# Altium PCB PCB.PcbDoc (part 1 of 2)
Units mm, origin at the board's own origin, x right, y up, seen from the top; angles counter-clockwise.
Board outline 82.77 x 70.07 mm, 4 copper layers (Top Layer, InternalPlane1, InternalPlane2, Bottom Layer), stack 1.963 mm thick; 175 components, 121 nets, 576 pads, 458 vias.
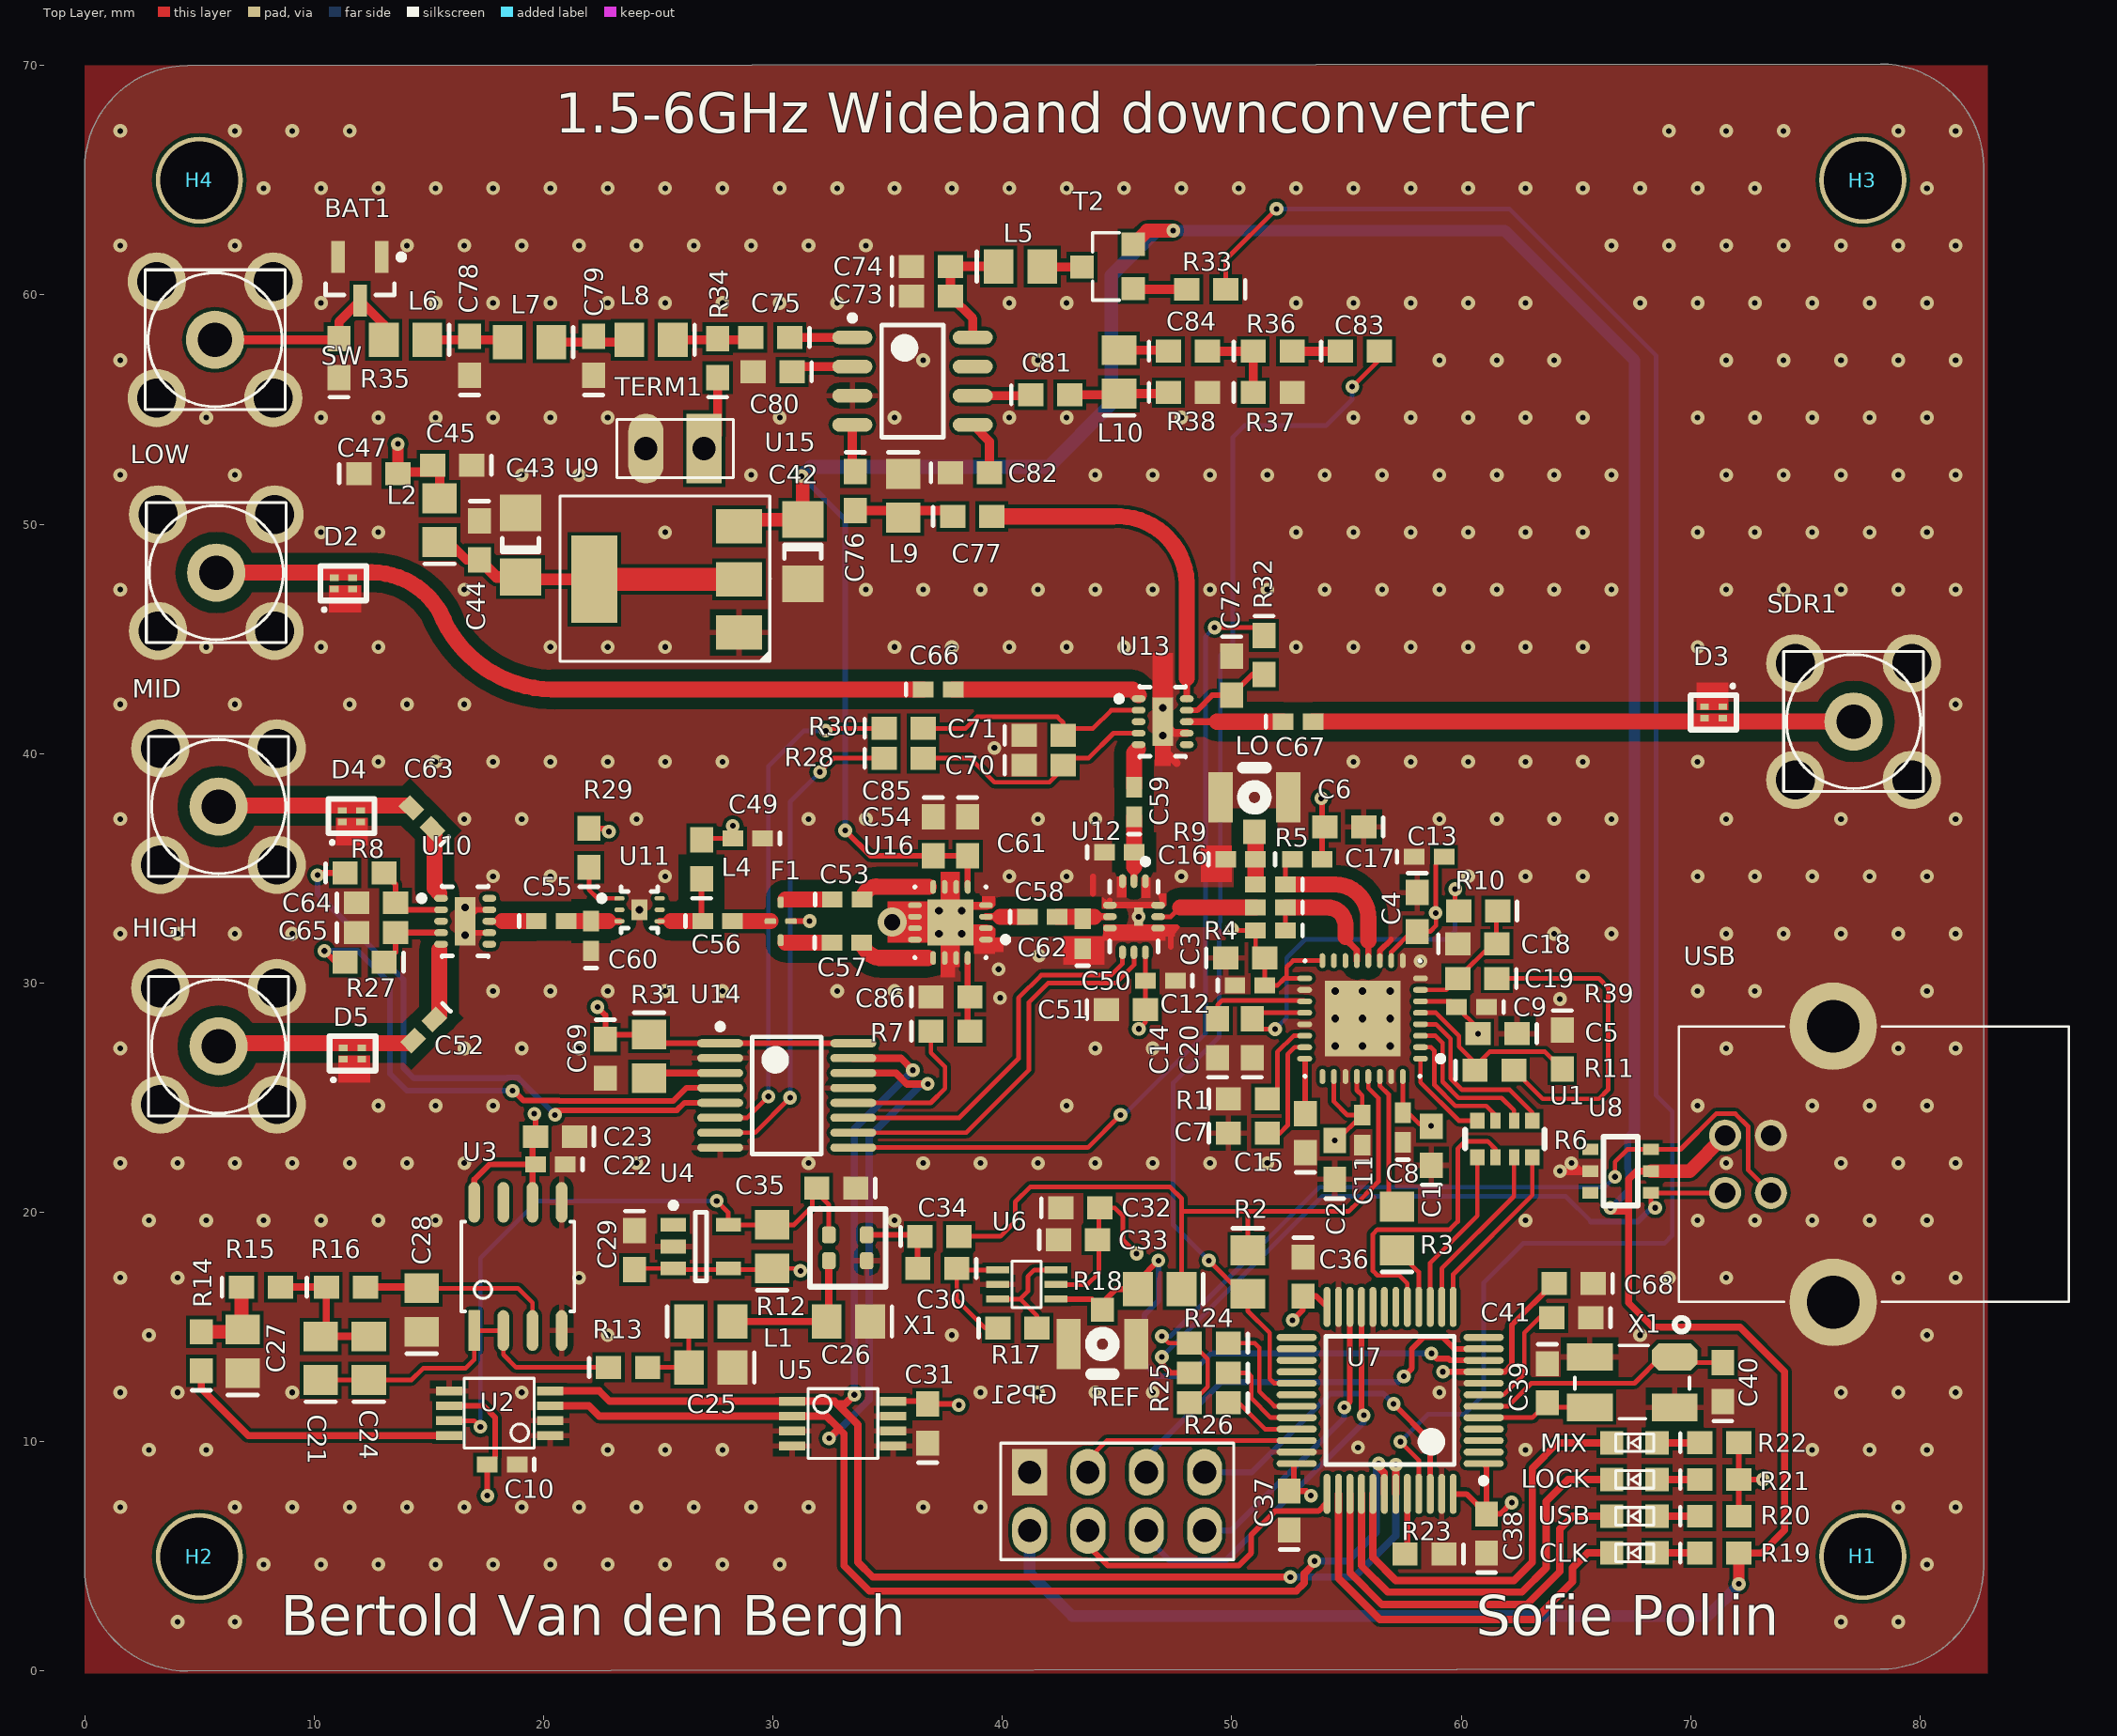
[diagram p0: Top Layer view]
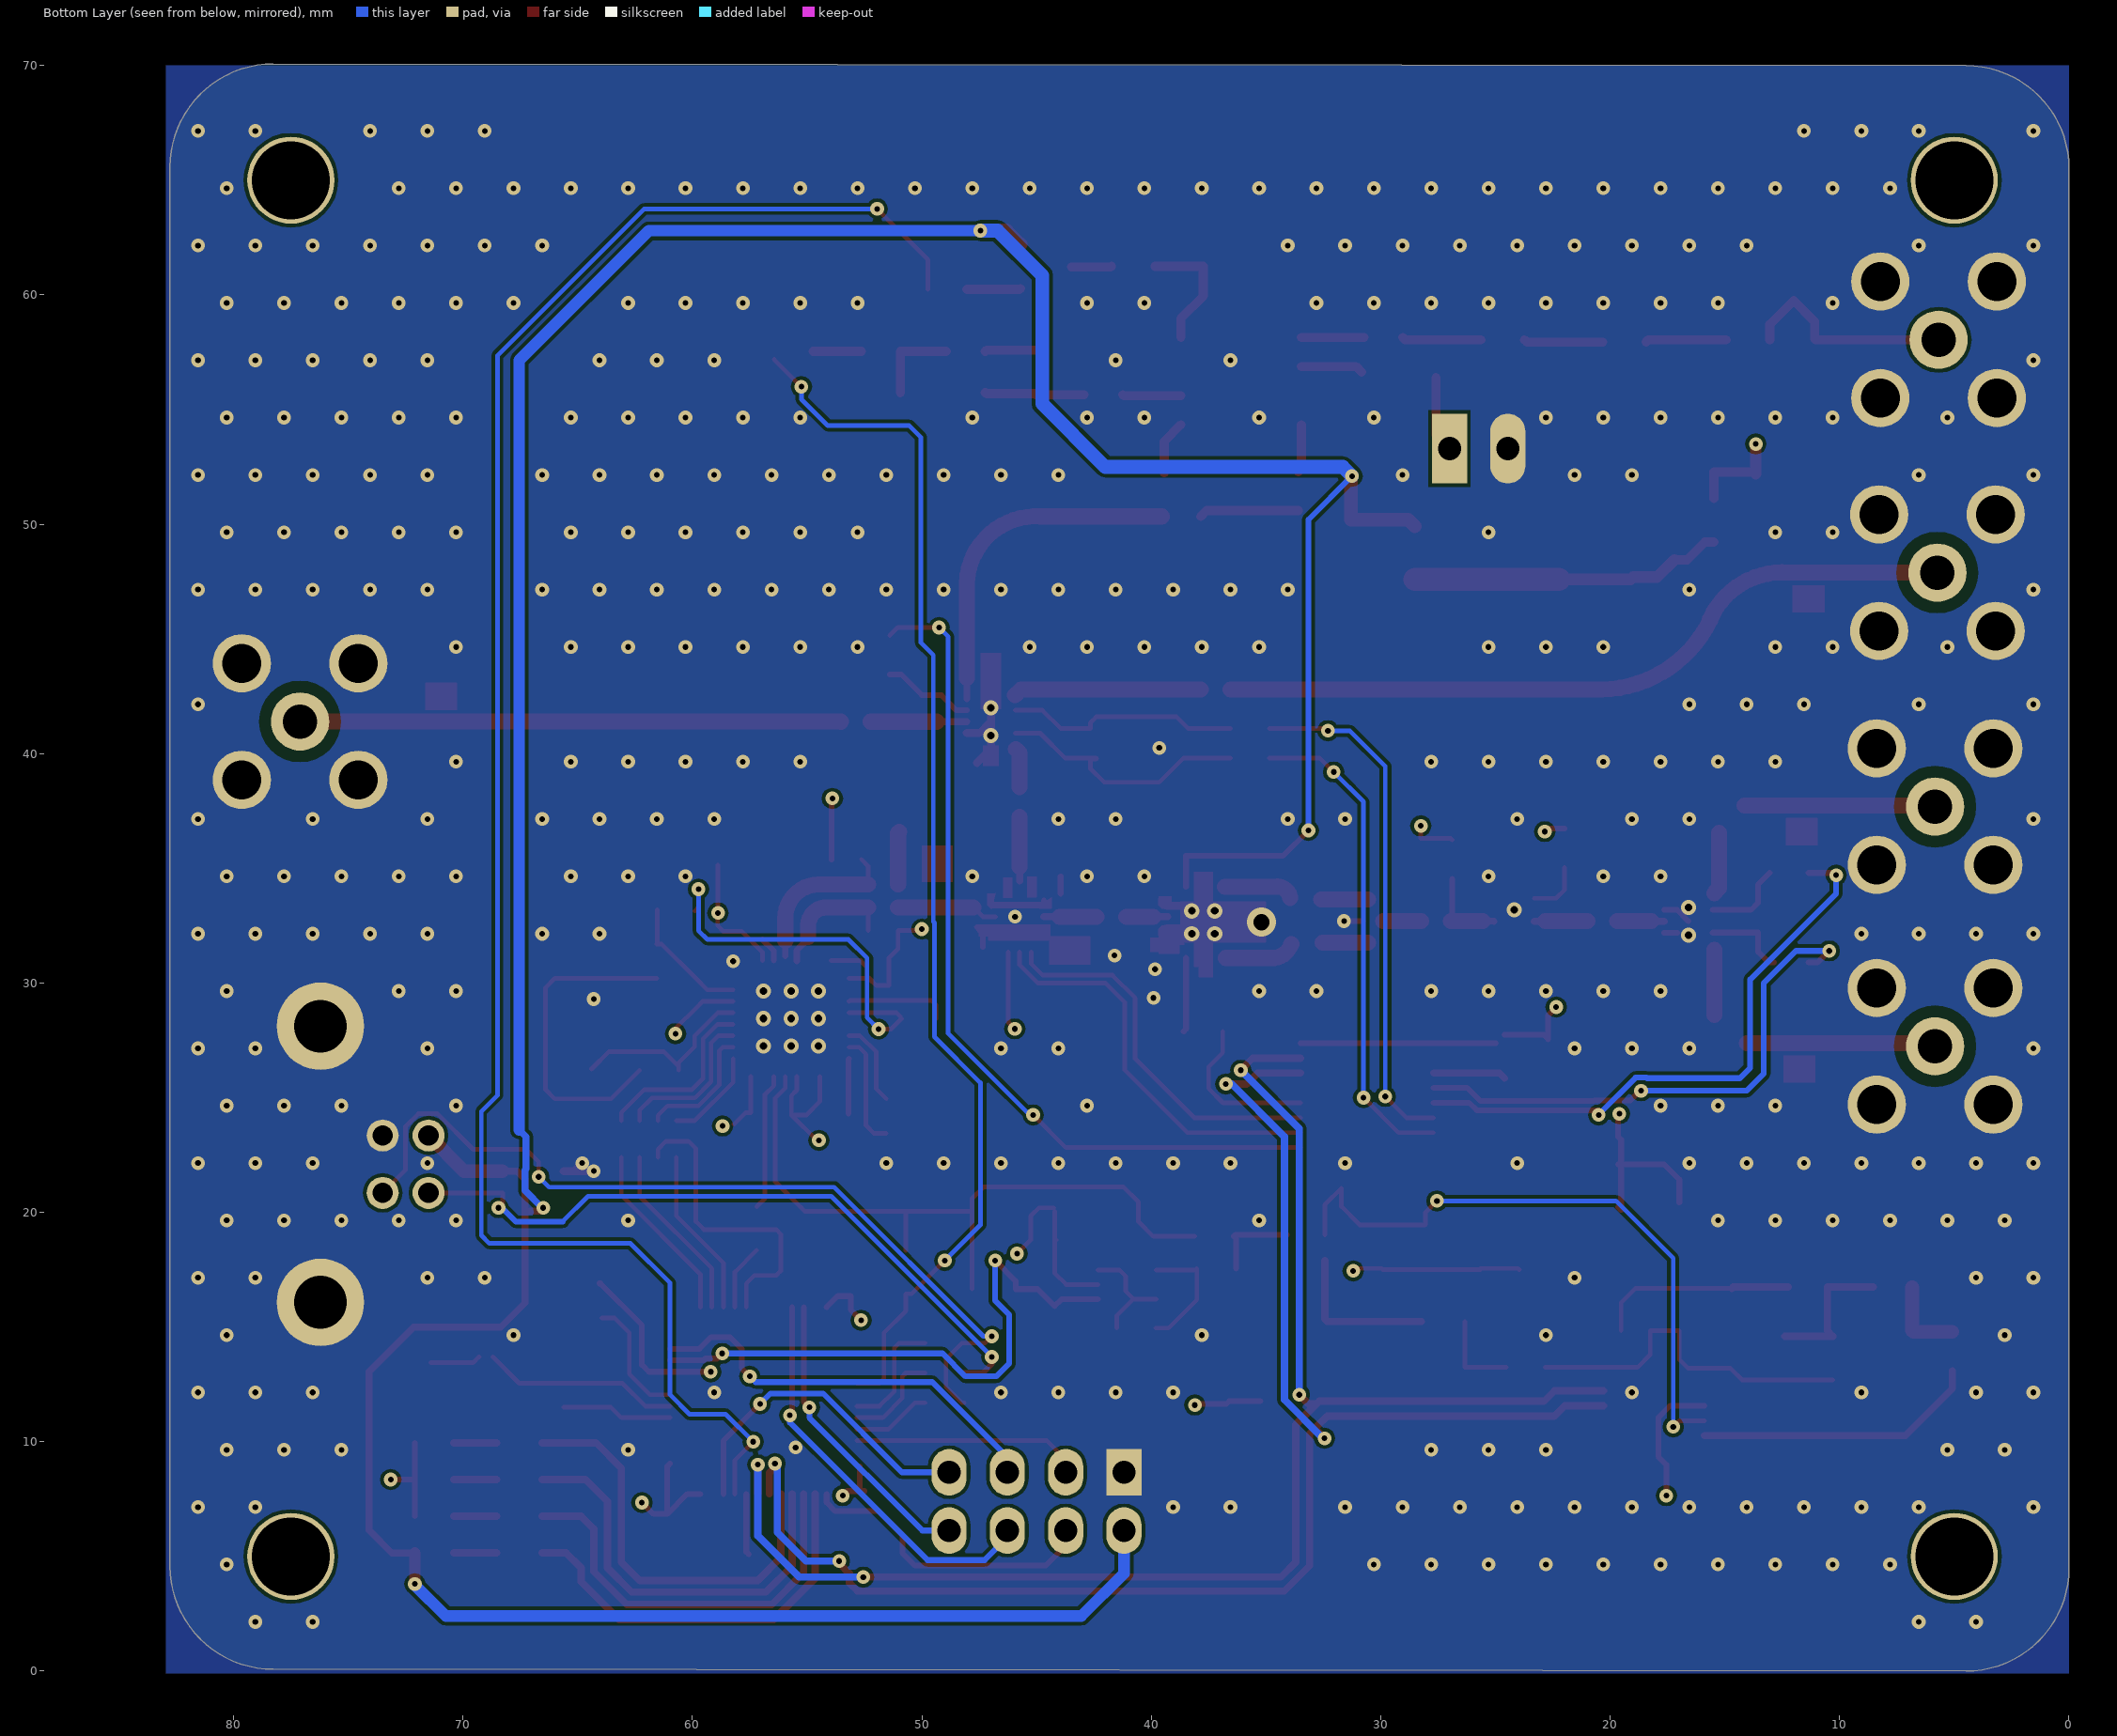
[diagram p1: Bottom Layer view, seen from below]
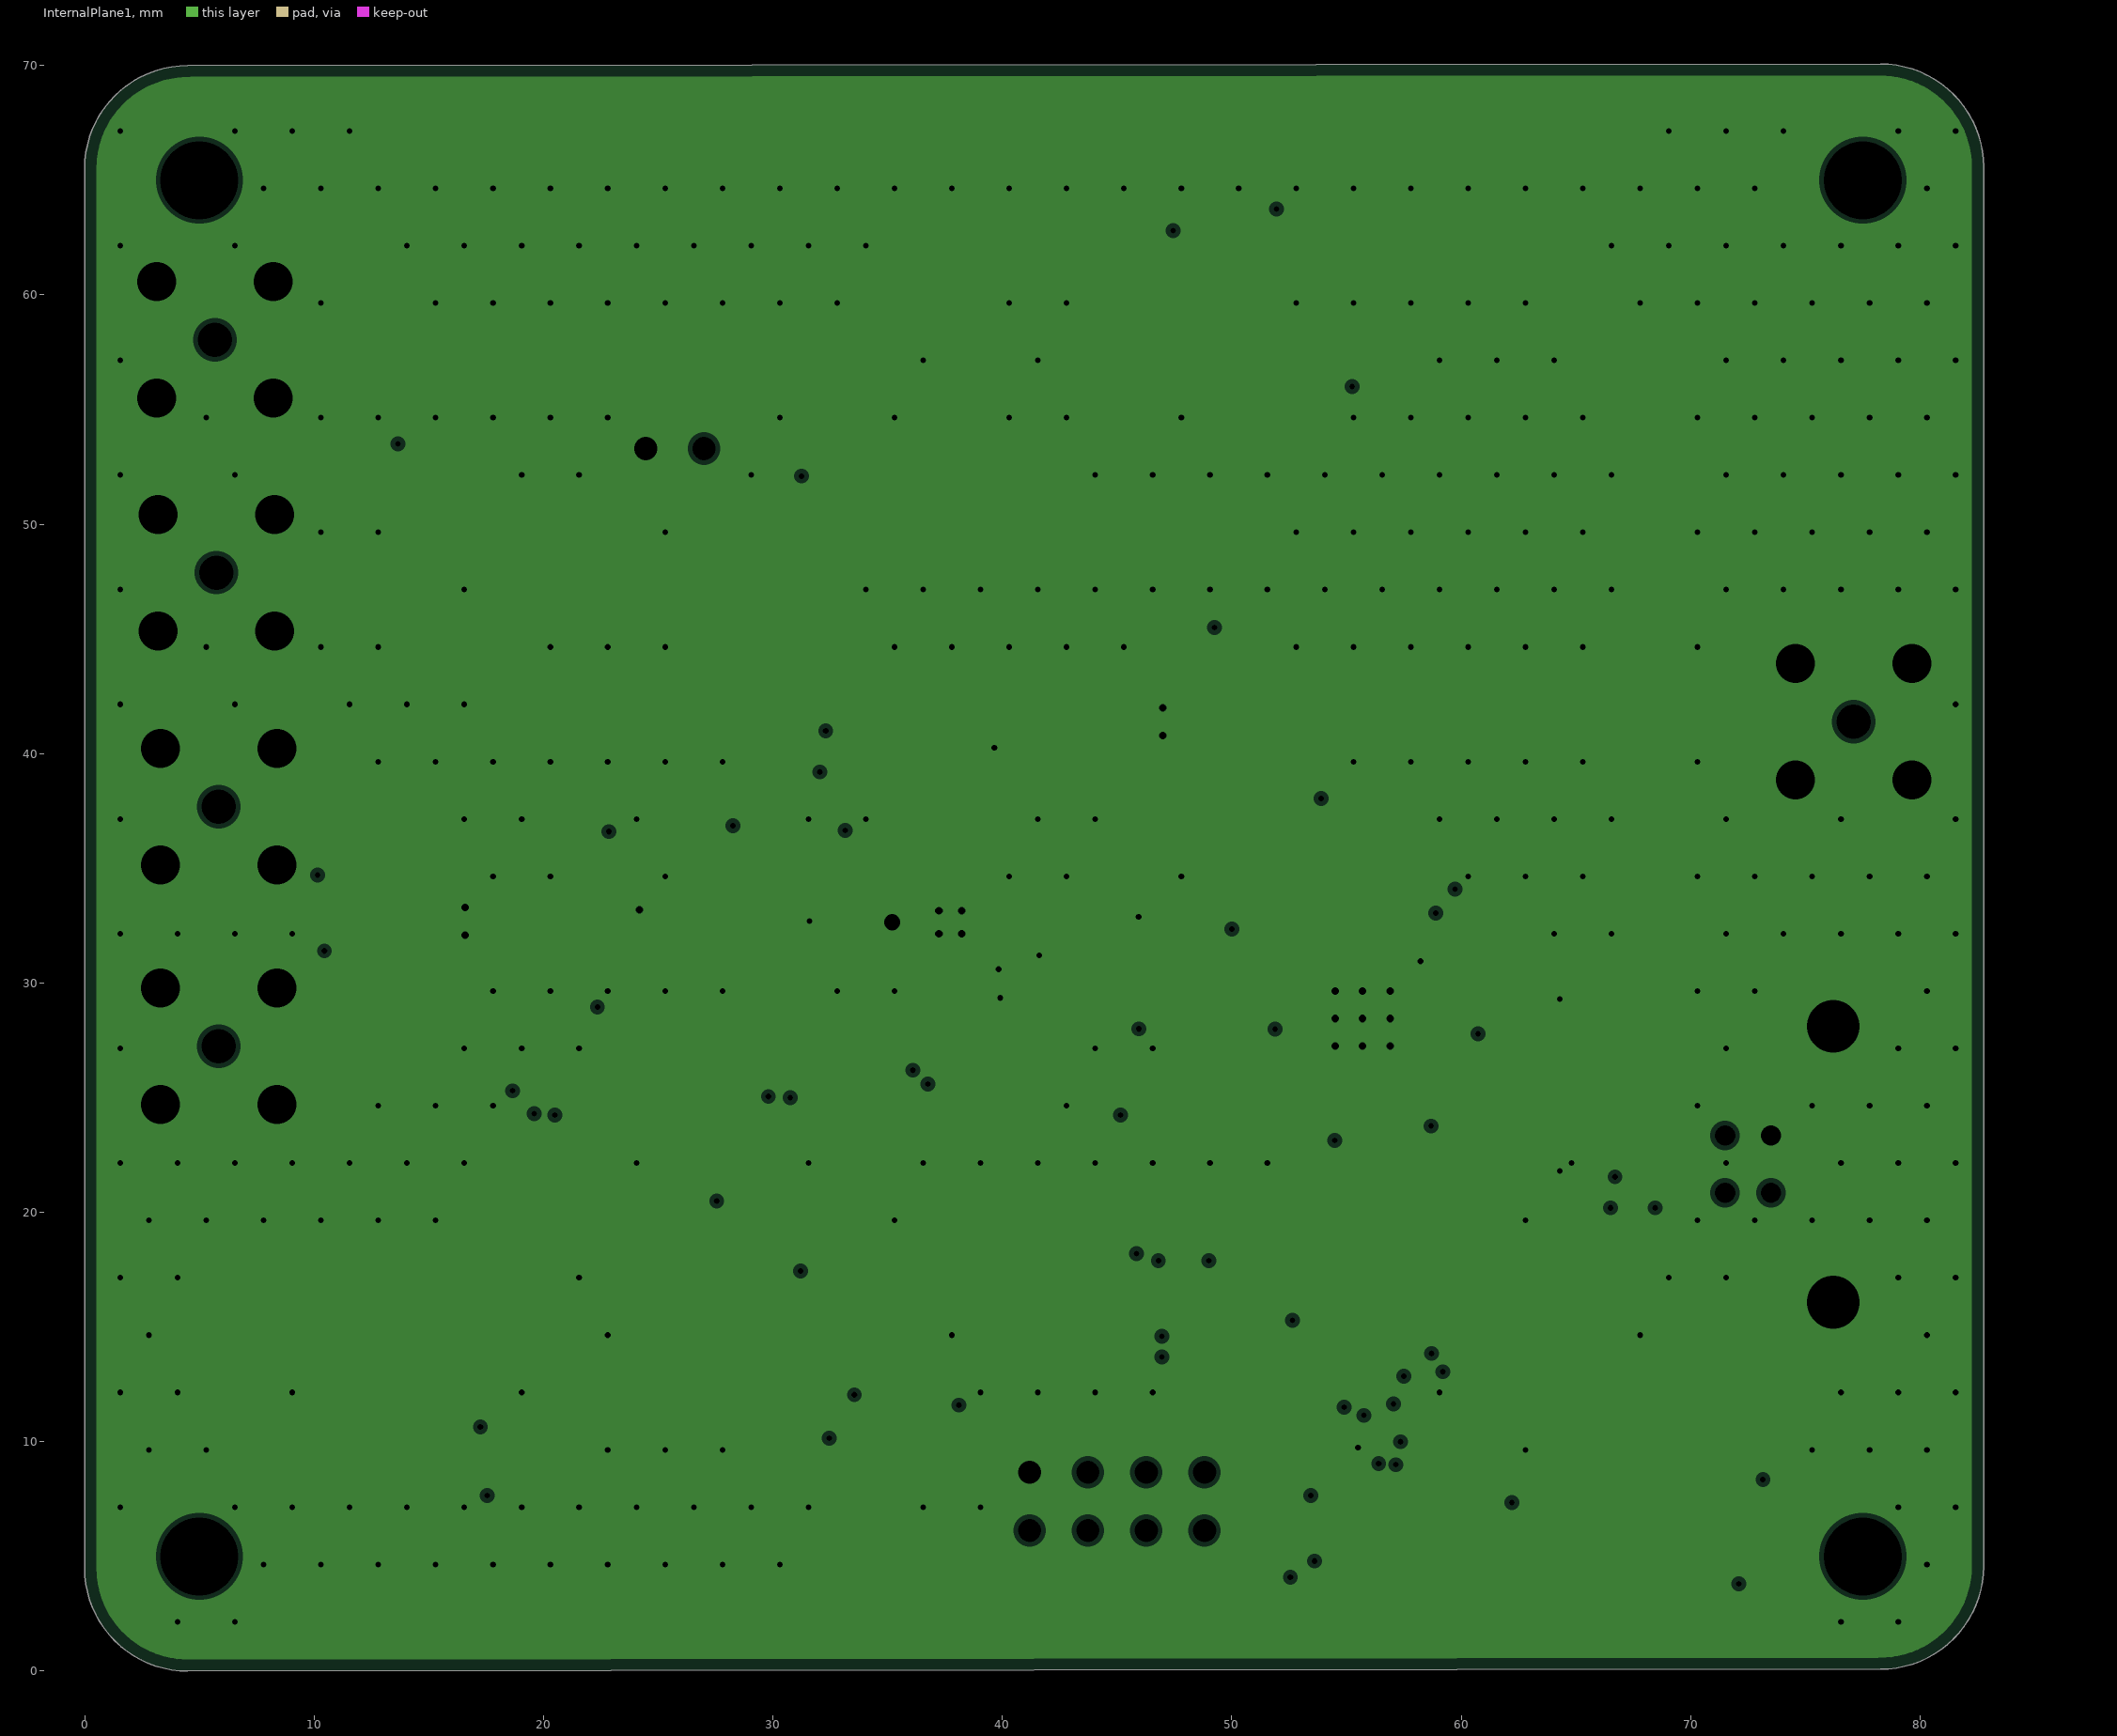
[diagram p2: InternalPlane1, clearances drawn from the general rule]
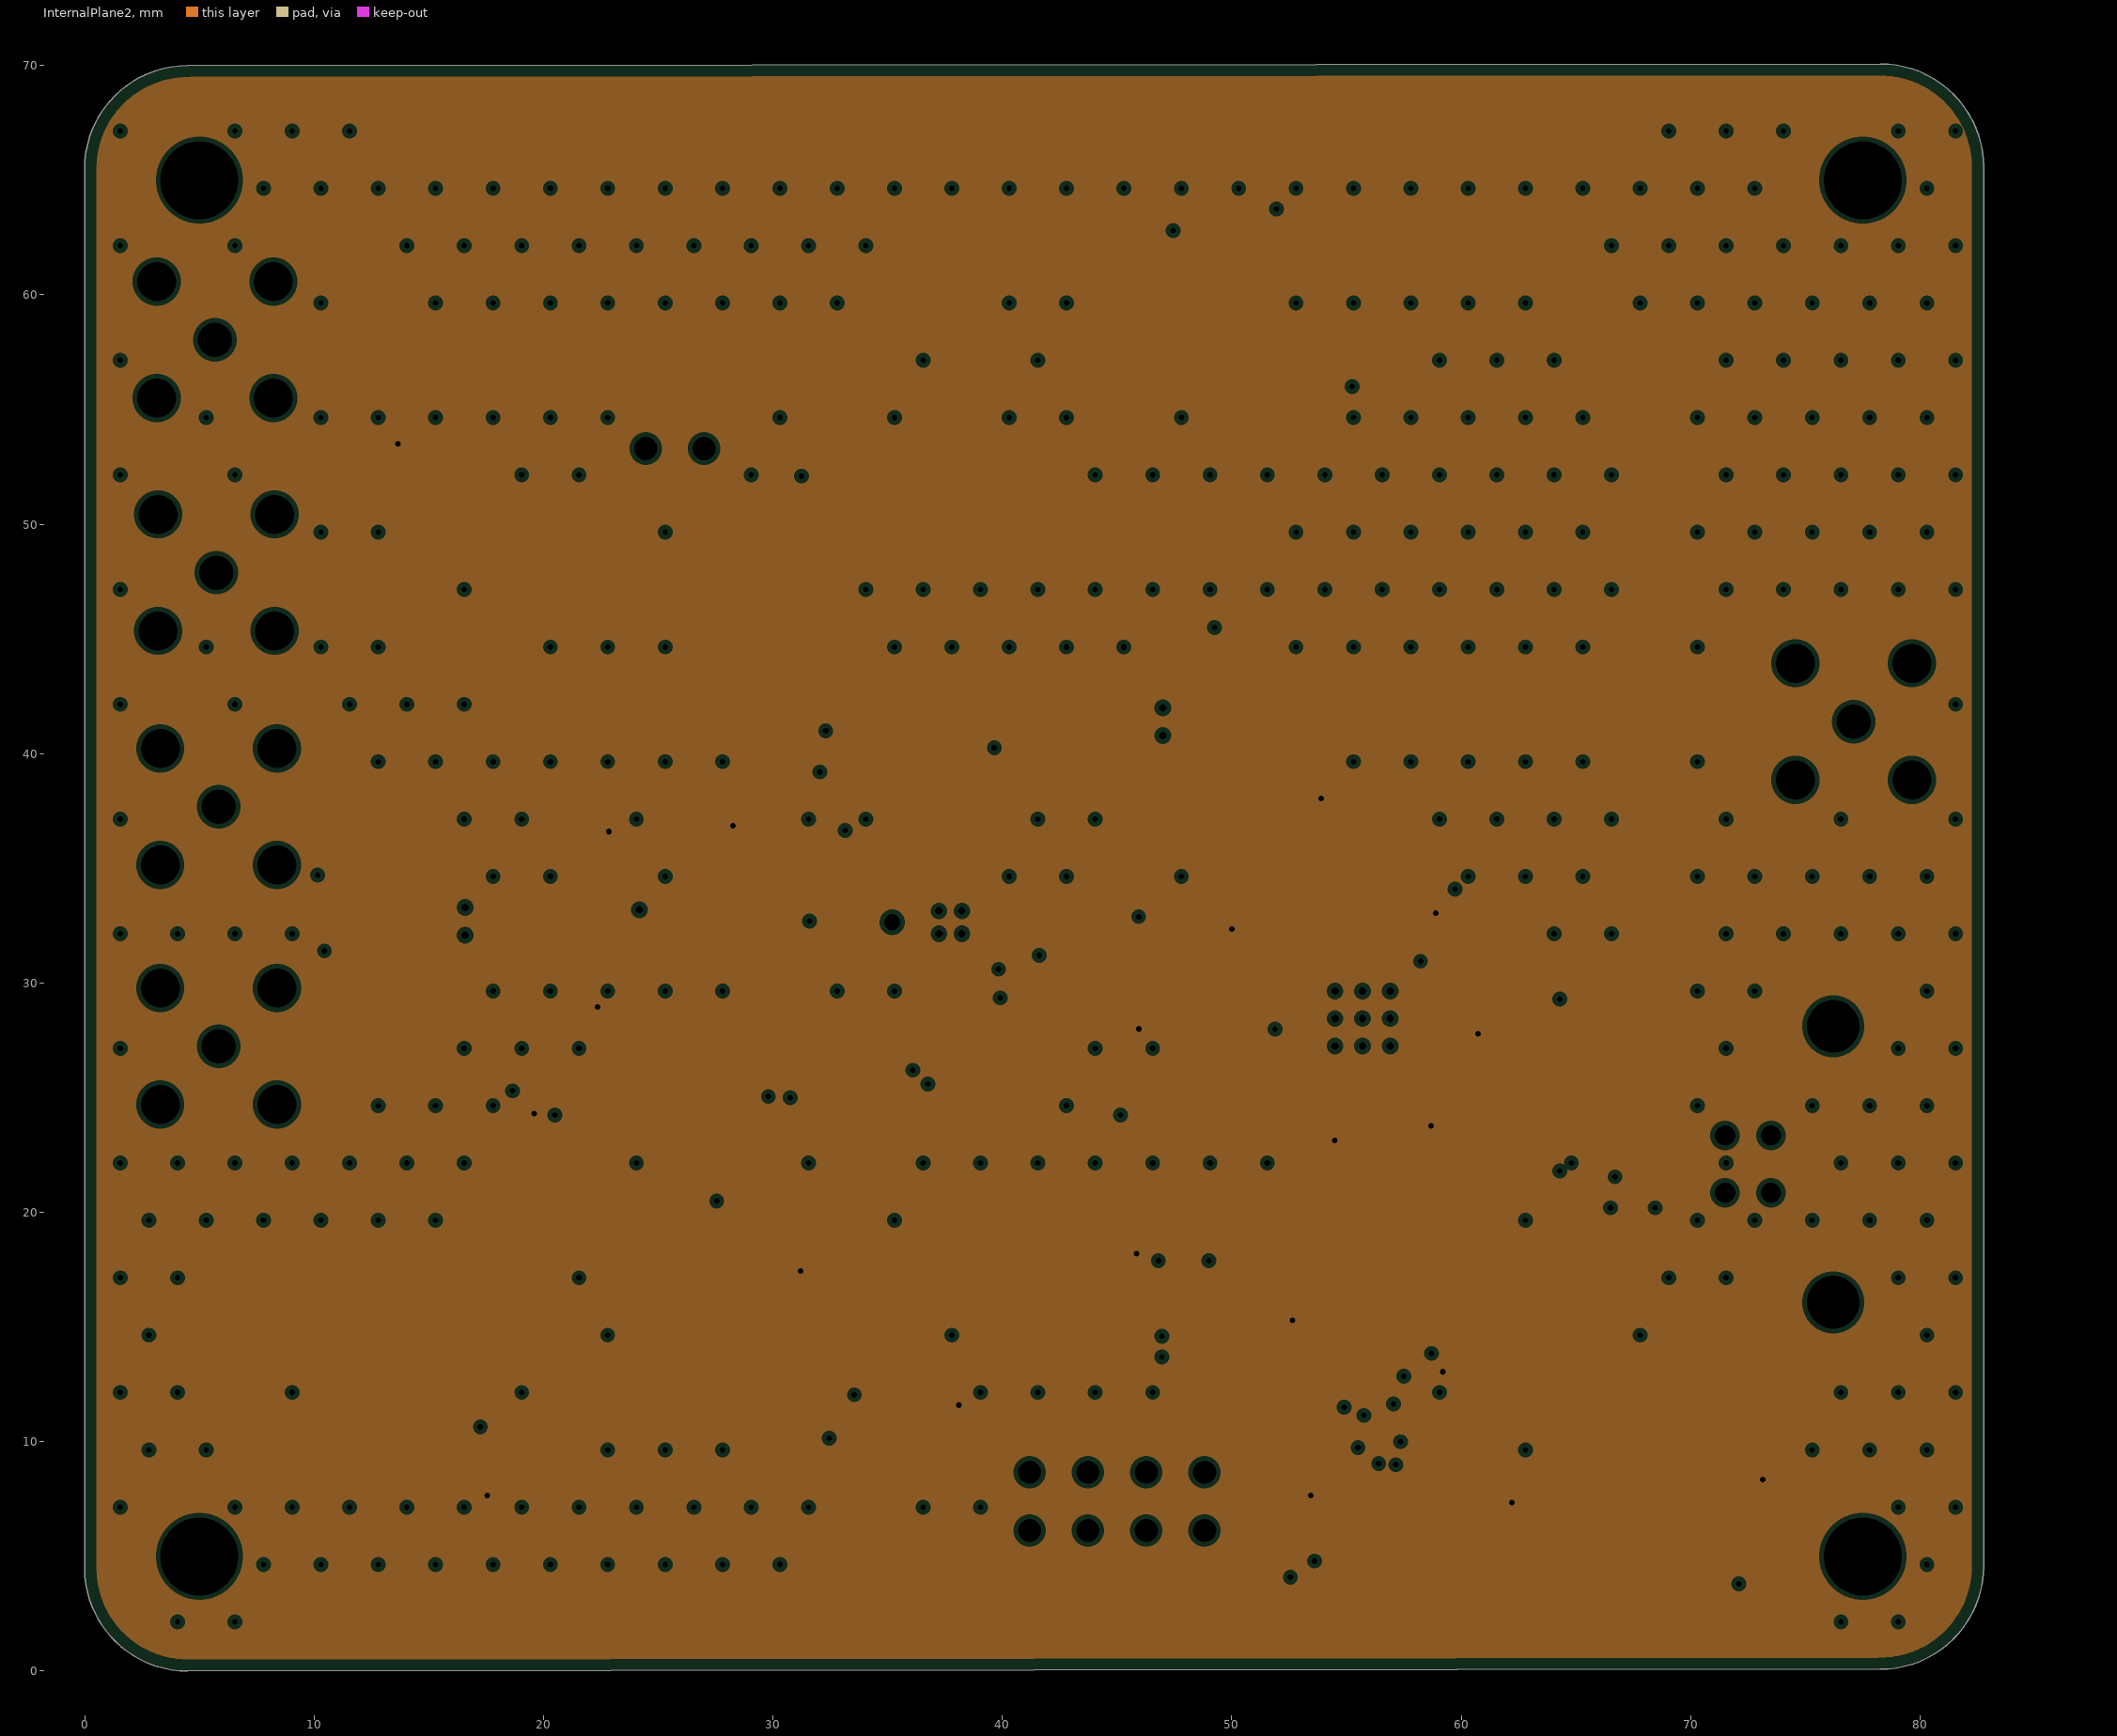
[diagram p3: InternalPlane2, clearances drawn from the general rule]

## Layer stack, top to bottom
Top Layer: signal copper 0.0356
Dielectric: core 0.36, FR-4, Dk 4.8
InternalPlane1: plane copper 0.036, net GND
Dielectric: prepreg 1.1, FR-4, Dk 4.8
InternalPlane2: plane copper 0.036, net 3V3
Dielectric: core 0.36, FR-4, Dk 4.8
Bottom Layer: signal copper 0.0356

## Board outline
0,4.5 0,65.5 cw(c4.5,65.5) 4.5,70 78.268,70.068 cw(c78.268,65.568) 82.768,65.568 82.768,4.582 cw(c78.268,4.582) 78.268,0.082 4.5,0 cw(c4.5,4.5)

## Design rules (kind name [scope] priority, off if disabled: settings)
Clearance Clearance_1 [(InPolygon) vs InNetClass('RF')] p1: gap=0.5
Clearance [All] p2: gap=0.15
DiffPairsRouting [(InDifferentialPairClass('All Differential Pairs'))] p1: maxlimit=0.254 minlimit=0.254 mostfreqgap=0.254 maxuncoupledlength=12.7
HoleSize [All] p1: absolutevalues=TRUE maxlimit=3.5 minlimit=0.025 maxpercent=80.000 minpercent=20.000
MinimumAnnularRing [All] p1: minimumring=0.125
MinimumSolderMaskSliver [All] p1: minsoldermaskwidth=0
PlaneClearance [All] p1: clearance=0.2
PlaneConnect [All] p1: planeconnectstyle=Direct reliefexpansion=0.508 reliefentries=4 reliefconductorwidth=0.254 reliefairgap=0.254
PolygonConnect PolygonConnect_1 [(InPadClass('Direct') or isVia) vs InNet('GND')] p1: connectstyle=Direct reliefconductorwidth=0.254 reliefentries=4 polygonreliefangle="90 Angle" airgapwidth=0.254
PolygonConnect [All] p2: connectstyle=Relief reliefconductorwidth=0.254 reliefentries=4 polygonreliefangle="90 Angle" airgapwidth=0.254
RoutingVias [All] p1: holewidth=0.4 width=0.8 viastyle="Through Hole" minholewidth=0.25 minwidth=0.6 maxholewidth=2 maxwidth=2.5
SilkToSilkClearance [All] p1 off: silktosilkclearance=0.254
SilkscreenOverComponentPads [IsPad] p1 off: minsilkscreentomaskgap=0.254
SolderMaskExpansion [All] p1: expansion=0
Width [All] p1: maxlimit=2.54 minlimit=0.15 preferedwidth=0.22
21 further rules are at their usual default settings.

## Classes and differential pairs
pad class Direct: BAT1-1 BAT1-2 BAT1-3 C7-2 C8-1 C8-2 C9-1 C9-2 C10-1 C10-2 C11-1 C11-2 C12-1 C12-2 C13-1 C13-2 C14-1 C14-2 C15-1 C15-2 C16-1 C16-2 C17-1 C17-2 C18-1 C18-2 C19-1 C19-2 C20-1 C20-2 C21-1 C21-2 C22-1 C22-2 C23-1 C23-2 C24-1 C24-2 C25-1 C25-2 C26-1 C26-2 C27-1 C27-2 C28-1 C28-2 C29-1 C29-2 C30-1 C30-2 C31-1 C31-2 C32-1 C32-2 C33-1 C33-2 C34-1 C34-2 C35-1 C35-2 C36-1 C36-2 C37-1 C37-2 C38-1 C38-2 C39-1 C39-2 C40-1 C40-2 C41-1 C41-2 C42-0 C42-1 C42-2 C43-0 C43-1 C43-2 C44-1 C44-2 C45-1 C45-2 C47-1 C47-2 C49-1 C49-2 C50-1 C50-2 C51-1 C51-2 C52-1 C52-2 C53-1 C53-2 C54-1 C54-2 C55-1 C55-2 C56-1 C56-2 C57-1 C57-2 C58-1 C58-2 C59-1 C59-2 C60-1 C60-2 C61-1 C61-2 C62-1 C62-2 C63-1 C63-2 C64-1 C64-2 C65-1 C65-2 C66-1 C66-2 C67-1 C67-2 C68-1 C68-2 C69-1 C69-2 C70-1 C70-2 C71-1 C71-2 C72-1 C72-2 C73-1 C73-2 C74-1 C74-2 C75-1 C75-2 C76-1 C76-2 C77-1 C77-2 C78-1 C78-2 C79-1 C79-2 C80-1 C80-2 C81-1 C81-2 C82-1 C82-2 C83-1 C83-2 C84-1 C84-2 C85-1 C85-2 C86-1 C86-2 CLK-1 CLK-2 D2-1 D2-2 D2-3 D2-4 D3-1 D3-2 D3-3 D3-4 D4-1 D4-2 D4-3 D4-4 D5-1 D5-2 D5-3 D5-4 DATA1-1 DATA1-2 DATA1-3 DATA1-4 DATA1-5 DATA1-6 F1-1 F1-2 F1-3 F1-4 GPS1-1 GPS1-2 GPS1-3 GPS1-4 GPS1-5 GPS1-6 GPS1-7 GPS1-8 H1-0 H2-0 H3-0 H4-0 HIGH-1 HIGH-2 HIGH-3 HIGH-4 HIGH-5 L1-1 L1-2 L2-1 L2-2 L4-1 L4-2 L5-1 L5-2 L6-1 L6-2 L7-1 L7-2 L8-1 L8-2 L9-1 L9-2 L10-1 L10-2 LO-0 LO-1 LOCK-1 LOCK-2 LOW-1 LOW-2 LOW-3 LOW-4 LOW-5 MID-1 MID-2 MID-3 MID-4 MID-5 MIX-1 MIX-2 R1-1 R1-2 R2-1 R2-2 R3-1 R3-2 R4-1 R4-2 R5-1 R5-2 R6-1 R6-2 R6-3 R6-4 R6-5 R6-6 R6-7 R6-8 R7-1 R7-2 R8-1 R8-2 R9-1 R9-2 R10-1 R10-2 R11-1 R11-2 R12-1 R12-2 R13-1 R13-2 R14-1 R14-2 R15-1 R15-2 R16-1 R16-2 R17-1 R17-2 R18-1 R18-2 R19-1 R19-2 R20-1 R20-2 R21-1 R21-2 R22-1 R22-2 R23-1 R23-2 R24-1 R24-2 R25-1 R25-2 R26-1 R26-2 R27-1 R27-2 R28-1 R28-2 R29-1 R29-2 R30-1 R30-2 R31-1 R31-2 R32-1 R32-2 R33-1 R33-2 R34-1 R34-2 R35-1 R35-2 R36-1 R36-2 R37-1 R37-2 R38-1 R38-2 R39-1 R39-2 REF-0 REF-1 SDR1-1 SDR1-2 SDR1-3 SDR1-4 SDR1-5 SW-1 SW-2 SW-3 SW-4 SW-5 T2-1 T2-2 T2-3 TERM1-1 TERM1-2 U1-1 U1-2 U1-3 U1-4 U1-5 U1-6 U1-7 U1-8 U1-9 U1-10 U1-11 U1-12 U1-13 U1-14 U1-15 U1-16 U1-17 U1-18 U1-19 U1-20 U1-21 U1-22 U1-23 U1-24 U1-25 U1-26 U1-27 U1-28 U1-29 U1-30 U1-31 U1-32 U1-33 U8-1 U8-2 U8-3 U8-4 U8-5 U8-6 U8-7 U9-4 U10-1 U10-2 U10-3 U10-4 U10-5 U10-6 U10-7 U10-8 U10-9 U10-10 U10-11 U11-1 U11-2 U11-3 U11-4 U11-5 U11-6 U11-7 U12-1 U12-2 U12-3 U12-4 U12-5 U12-6 U12-7 U12-8 U12-9 U12-10 U12-11 U12-12 U12-13 U13-1 U13-2 U13-3 U13-4 U13-5 U13-6 U13-7 U13-8 U13-9 U13-10 U13-11 USB-1 USB-2
component class U_Mixer: C49 C50 C51 C52 C53 C54 C55 C56 C57 C58 C59 C60 C61 C62 C63 C64 C65 C66 C67 C68 C69 C70 C71 C72 C85 C86 D2 D3 D4 D5 F1 HIGH L4 LOW MID R7 R8 R27 R28 R29 R30 R31 R32 SDR1 U10 U11 U12 U13 U14 U16
component class U_MixerHF: BAT1 C73 C74 C75 C76 C77 C78 C79 C80 C81 C82 C83 C84 L5 L6 L7 L8 L9 L10 R33 R34 R35 R36 R37 R38 SW T2 TERM1 U15
component class U_LO: C1 C2 C3 C4 C5 C6 C7 C8 C9 C10 C11 C12 C13 C14 C15 C16 C17 C18 C19 C20 C21 C22 C23 C24 C25 C26 C27 C28 C29 C30 C31 C32 C33 C34 C35 L1 LO R1 R2 R3 R4 R5 R6 R9 R10 R11 R12 R13 R14 R15 R16 R17 R18 R39 REF U1 U2 U3 U4 U5 U6 X1
component class U_CPU: C36 C37 C38 C39 C40 C41 C42 C43 C44 C45 C47 CLK GPS1 L2 LOCK MIX R19 R20 R21 R22 R23 R24 R25 R26 U7 U8 U9 USB X1
net class RF: LO+ LO- NetC16_1 NetC17_1 NetC52_1 NetC52_2 NetC53_1 NetC53_2 NetC55_1 NetC55_2 NetC56_1 NetC57_1 NetC57_2 NetC58_1 NetC58_2 NetC59_1 NetC59_2 NetC63_1 NetC63_2 NetC66_1 NetC66_2 NetC67_1 NetC67_2
component class Toplevel: H1 H2 H3 H4

## Components (designator, comment, footprint, x,y, rotation, side; value= is the part's Value field where it differs from the comment)
BAT1 "" SOT95P230X110-3N 12,60.7 r270 top
C1 "100nF" "smd C0603_0.80" 58.7,22.9 r90 top
C2 "100nF" "smd C0603_0.80" 54.486,22.292 r90 top
C3 "100nF" "smd C0603_0.80" 50.586,31.092 r0 top
C4 "100nF" "smd C0603_0.80" 58.086,33.092 r270 top
C5 "100nF" "smd C0603_0.80" 61.586,27.792 r180 top
C6 "100nF" "smd C0603_0.80" 54.9,36.8 r180 top
C7 "1uF" "smd C0603_0.80" 50.7,23.45 r0 top
C8 "10nF" "smd C0402" 57.45,23.7 r90 top
C9 "10nF" "smd C0402" 60.45,28.95 r180 top
C10 "10nF" "smd C0402" 18.2,9 r180 top
C11 "10nF" "smd C0402" 55.686,23.592 r90 top
C12 "10nF" "smd C0402" 50.786,29.892 r0 top
C13 "10nF" "smd C0402" 58.6,35.5 r0 top
C14 "1uF" "smd C0603_0.80" 49.386,27.592 r90 top
C15 "1uF" "smd C0603_0.80" 53.2,23.45 r90 top
C16 "22pF" "smd C0402" 51.686,33.292 r180 top
C17 "22pF" "smd C0402" 51.686,34.292 r180 top
C18 "12nF" "smd C0603_0.80" 60.7,31.7 r0 top
C19 "100nF" "smd C0603_0.80" 60.7,30.2 r180 top
C20 "820pF" "smd C0603_0.80" 50.886,27.592 r90 top
C21 "3.3uF" "smd C0805_1.30" 10.286,13.642 r90 top
C22 "10nF" "smd C0402" 20.3,22.1 r180 top
C23 "100nF" "smd C0603_0.80" 20.5,23.3 r180 top
C24 "2.2uF" "smd C0805_1.30" 12.386,13.642 r90 top
C25 "330nF" "smd C0805_0.60" 27.286,13.242 r180 top
C26 "330nF" "smd C0805_0.60" 33.286,15.242 r180 top
C27 "2.2uF" "smd C0805_1.30" 6.886,13.942 r90 top
C28 "330nF" "smd C0805_0.60" 14.686,15.742 r90 top
C29 "100nF" "smd C0603_0.80" 23.961,18.357 r270 top
C30 "100nF" "smd C0603_0.80" 37.161,17.557 r180 top
C31 "100nF" "smd C0603_0.80" 36.736,10.792 r90 top
C32 "100nF" "smd C0603_0.80" 43.4,20.2 r0 top
C33 "10nF" "smd C0603_0.80" 43.3,18.8 r0 top
C34 "100nF" "smd C0603_0.80" 37.261,18.957 r0 top
C35 "100nF" "smd C0603_0.80" 32.761,21.057 r180 top
C36 "100nF" "smd C0603_0.80" 53.1,17.2 r270 top
C37 "100nF" "smd C0603_0.80" 52.5,7 r90 top
C38 "100nF" "smd C0603_0.80" 61.1,6 r90 top
C39 "10pF" "smd C0603_0.80" 63.75,12.55 r270 top
C40 "10pF" "smd C0603_0.80" 71.4,12.6 r90 top
C41 "100nF" "smd C0603_0.80" 64.8,15.4 r180 top
C42 "10uF" "smd C1206 polar" 31.3,48.8 r270 top
C43 "10uF" "smd C1206 polar" 19,49.1 r90 top
C44 "100nF" "smd C0603_0.80" 17.2,49.3 r270 top
C45 "100nF" "smd C0603_0.80" 16.025,52.575 r180 top
C47 "10nF" "smd C0603_0.80" 12.8,52.2 r0 top
C49 "10nF" "smd C0402" 28.9,36.3 r180 top
C50 "10nF" "smd C0402" 46.886,30.092 r180 top
C51 "100nF" "smd C0603_0.80" 45.386,28.842 r0 top
C52 "22pF" "smd C0402" 14.775,27.95 r225 top
C53 "22pF" "smd C0402" 33.236,33.642 r0 top
C54 "100nF" "smd C0603_0.80" 36.986,36.392 r270 top
C55 "22pF" "smd C0402" 20.336,32.692 r0 top
C56 "22pF" "smd C0402" 27.586,32.692 r0 top
C57 "100pF" "smd C0402" 33.225,31.75 r0 top
C58 "22pF" "smd C0402" 41.736,32.892 r0 top
C59 "100pF" "smd C0402" 45.736,37.892 r90 top
C60 "0.2pF" "smd C0402" 22.075,32.05 r90 top
C61 "0.15pF" "smd C0402" 45.1,35.7 r0 top
C62 "0.15pF" "smd C0402" 43.5,32.15 r90 top
C63 "100pF" "smd C0402" 14.7,37.175 r135 top
C64 "100pF" "smd C0603_0.80" 12.7,33.5 r0 top
C65 "100pF" "smd C0603_0.80" 12.7,32.2 r0 top
C66 "100pF" "smd C0402" 37.2,42.8 r0 top
C67 "100pF" "smd C0402" 52.886,41.392 r0 top
C68 "100nF" "smd C0603_0.80" 64.9,16.9 r180 top
C69 "100nF" "smd C0603_0.80" 22.7,26.7 r270 top
C70 "100pF" "smd C0603_0.80" 41.8,39.5 r0 top
C71 "100pF" "smd C0603_0.80" 41.8,40.8 r0 top
C72 "100pF" "smd C0603_0.80" 50,43.4 r270 top
C73 "10nF" "smd C0603_0.80" 36.886,59.942 r0 top
C74 "100nF" "smd C0603_0.80" 36.886,61.242 r0 top
C75 "10nF" "smd C0603_0.80" 29.886,58.142 r180 top
C76 "47pF" "smd C0603_0.80" 33.586,51.442 r270 top
C77 "6.8pF" "smd C0603_0.80" 38.686,50.342 r0 top
C78 "47pF" "smd C0603_0.80" 16.786,57.342 r90 top
C79 "47pF" "smd C0603_0.80" 22.186,57.342 r90 top
C80 "10nF" "smd C0603_0.80" 29.986,56.642 r180 top
C81 "10nF" "smd C0603_0.80" 42.086,55.642 r0 top
C82 "47pF" "smd C0603_0.80" 38.586,52.242 r0 top
C83 "47pF" "smd C0603_0.80" 55.586,57.542 r0 top
C84 "9.1pF" "smd C0603_0.80" 48.086,57.542 r0 top
C85 "100pF" "smd C0603_0.80" 38.486,36.392 r270 top
C86 "100pF" "smd C0603_0.80" 37.736,29.392 r0 top
CLK "HSMR-C190" "led HSMH-C190 (Avago Technologies)" 67.546,5.154 r180 top (schematic designator CLK1)
D2 "ESD0P8RFL" ESD0P8RFL 11.275,47.425 r270 top
D3 "ESD0P8RFL" ESD0P8RFL 71,41.8 r90 top
D4 "ESD0P8RFL" ESD0P8RFL 11.625,37.275 r270 top
D5 "ESD0P8RFL" ESD0P8RFL 11.675,26.925 r270 top
F1 "DPX165850DT-8017A1" DPX165850DT-8017A1 30.336,32.692 r270 top
GPS1 "CON HDR 2x4" "hdr 2x4" 45,7.4 r0 top
H1 "MOUNTHOLE_3MM" MOUNT_3MM 77.5,5 r0 top
H2 "MOUNTHOLE_3MM" MOUNT_3MM 5,5 r0 top
H3 "MOUNTHOLE_3MM" MOUNT_3MM 77.5,65 r0 top
H4 "MOUNTHOLE_3MM" MOUNT_3MM 5,65 r0 top
HIGH "CON SMA" "con SMA (recht)" 5.836,27.242 r0 top (schematic designator HIGH1)
L1 "Ferrite 0805" "smd C0805" 27.286,15.242 r0 top
L2 "Ferrite 0805" "smd C0805" 15.475,50.175 r90 top
L4 "SPL603/220nH" "smd C0603" 26.886,35.392 r90 top
L5 "Ferrite 0805" "smd C0805" 40.786,61.242 r0 top
L6 "422nH" "smd C0805" 13.986,58.042 r180 top
L7 "422nH" "smd C0805" 19.386,57.942 r180 top
L8 "422nH" "smd C0805" 24.686,58.042 r180 top
L9 "510nH" "smd C0805" 35.686,51.242 r270 top
L10 "510nH" "smd C0805" 45.086,56.642 r90 top
LO "U.FL" "smd U.FL" 50.986,38.092 r180 top (schematic designator LOTEST1)
LOCK "HSMG-C190" "led HSMH-C190 (Avago Technologies)" 67.546,8.354 r180 top (schematic designator LOCK1)
LOW "CON SMA" "con SMA (recht)" 5.736,47.892 r0 top (schematic designator LOW1)
MID "CON SMA" "con SMA (recht)" 5.836,37.692 r0 top (schematic designator MID1)
MIX "HSMY-C190" "led HSMH-C190 (Avago Technologies)" 67.546,9.954 r180 top (schematic designator MIX1)
R1 "5K1/603" "smd C0603_0.45" 50.7,24.95 r0 top
R2 "0R/805/NP" "smd C0805_0.50" 50.7,17.4 r270 top
R3 "270R/805" "smd C0805_0.50" 57.2,19.3 r90 top
R4 "50" "smd C0402_0.35" 51.686,32.292 r180 top
R5 "50" "smd C0402_0.35" 53.286,35.392 r0 top
R6 "22R" "smd R EXB38v" 61.9,23.2 r0 top
R7 "750" "smd C0603_0.45" 37.736,27.892 r0 top
R8 "22" "smd C0603_0.45" 12.2,34.8 r0 top
R9 "50" "smd C0402_0.35" 50.386,35.392 r0 top
R10 "240" "smd C0603_0.45" 60.736,33.142 r180 top
R11 "30.1" "smd C0603_0.45" 61.45,26.2 r0 top
R12 "0R/805/NP" "smd C0805_0.50" 29.961,18.507 r90 top
R13 "100K/603" "smd C0603_0.45" 23.686,13.242 r0 top
R14 "100K/603" "smd C0603_0.45" 5.086,13.942 r90 top
R15 "100K/603" "smd C0603_0.45" 7.686,16.742 r0 top
R16 "100K/603" "smd C0603_0.45" 11.386,16.742 r0 top
R17 "100K/603" "smd C0603_0.45" 40.661,14.957 r0 top
R18 "0R/805/NP" "smd C0805_0.50" 46.861,16.657 r180 top
R19 "470R/603" "smd C0603_0.45" 71.246,5.154 r0 top
R20 "470R/603" "smd C0603_0.45" 71.246,6.754 r0 top
R21 "470R/603" "smd C0603_0.45" 71.246,8.354 r0 top
R22 "470R/603" "smd C0603_0.45" 71.246,9.954 r0 top
R23 "1K5" "smd C0603_0.45" 58.4,5.1 r180 top
R24 "1K5/603" "smd C0603_0.45" 49,14.3 r180 top
R25 "22R/603" "smd C0603_0.45" 49,13 r180 top
R26 "22R/603" "smd C0603_0.45" 49,11.7 r180 top
R27 "22" "smd C0603_0.45" 12.2,30.9 r180 top
R28 "22" "smd C0603_0.45" 35.7,39.8 r0 top
R29 "750" "smd C0603_0.45" 21.986,35.892 r90 top
R30 "22" "smd C0603_0.45" 35.7,41.1 r0 top
R31 "1K8" "smd C0805_0.50" 24.6,26.8 r270 top
R32 "22" "smd C0603_0.45" 51.4,44.3 r270 top
R33 "10K/603" "smd C0603_0.45" 48.886,60.242 r180 top
R34 "51R/603" "smd C0603_0.45" 27.586,57.242 r90 top
R35 "10K/603" "smd C0603_0.45" 11.086,57.242 r90 top
R36 "390R/603" "smd C0603_0.45" 51.786,57.542 r0 top
R37 "51R/603" "smd C0603_0.45" 51.786,55.742 r0 top
R38 "51R/603" "smd C0603_0.45" 48.086,55.742 r0 top
R39 "91" "smd C0603_0.45" 64.4,27.1 r270 top
REF "U.FL" "smd U.FL" 44.361,14.257 r0 top (schematic designator REFTEST1)
SDR1 "CON SMA" "con SMA (recht)" 77.1,41.4 r0 top
SW "CON SMA" "con SMA (recht)" 5.686,58.042 r0 top (schematic designator SW1)
T2 "BC856" "smd SOT-23" 44.586,61.242 r90 top
TERM1 "CON HDR 1x2" "hdr 1x2" 27,53.3 r180 top
U1 "MAX2870" MAXIM-T3255 55.7,28.45 r180 top
U2 "DAC121C085CIMM/NOPB" "smd MSOP/8" 18.086,11.242 r90 top
U3 "MCP6422" "smd soicn/8" 18.886,17.642 r0 top
U4 "LM4120" "SO23-5 TI" 26.861,18.507 r0 top
U5 "MCP9804/NP" "smd MSOP/8" 33.036,10.792 r270 top
U6 "NC7WZU04" "SMD SC-70 (6-pin)" 41.061,16.857 r270 top
U7 "STM32F103C8T6" TSQFP50P900X900X160-48N 56.9,11.8 r180 top
U8 "IP4220CZ6" "smd SOT-457" 66.95,21.8 r270 top
U9 "LD1117-SOT223" SOT223 25.8,47.6 r90 top
U10 "SKY13322-375LF" QFN50P200X300X80-10N 16.586,32.692 r0 top
U11 "GRF4001" GRF4001 24.186,33.192 r0 top
U12 "LTC5549" LTC5549 45.736,32.892 r270 top
U13 "SKY13322-375LF" QFN50P200X300X80-10N 46.986,41.392 r0 top
U14 "TCA6408A" TSOP65P640X100-16M 30.6,25.1 r0 top
U15 "SA612" SOIC127P600X175-8N 36.086,56.242 r0 top
U16 "RF3025" QFN50P300X300X100-16N 37.736,32.642 r180 top
USB "USB-B" USB-B 71.5,23.35 r90 top (schematic designator DATA1)
USB "HSMH-C190" "led HSMH-C190 (Avago Technologies)" 67.546,6.754 r180 top (schematic designator USB1)
X1 "X1G004691000112 (3.3V)" X1G004691000112 33.261,18.457 r0 top
X1 "KTL/5x3.2mm 16MHz" "smd KTL 5x3.2" 69.3,13.7 r180 top

## Footprints (in the part's own frame and the unit in brackets; to place one, negate y for a bottom-side part, rotate by r counter-clockwise, add the part's x,y. Pads: shape width x height; smd on the part's side, far side on the other; paste and mask are expansions set on the pad)
"con SMA (recht)" [mil]
  round 100 / inner round 60 / far side round 100 hole 59 paste+0 mask+0: 1(0,0)
  round 100 / inner round 60 / far side round 100 hole 67 paste+0 mask+0: 2(-100,100) 3(-100,-100) 4(100,-100) 5(100,100)
  silkscreen extent -120,-120 120,120
DPX165850DT-8017A1 [mm]
  rrect50% 0.5x0.25 smd: 1(-0.825,0) 3(0.825,0)
  rrect50% 0.25x0.5 smd: 2(0,-0.45) 4(0,0.45)
ESD0P8RFL [mm]
  rect 0.28x0.38 smd: 1(0.25,-0.4) 2(0.25,0.4) 3(-0.25,0.4) 4(-0.25,-0.4)
  silkscreen extent -0.76,-1 1.17,1
GRF4001 [mm] "QFN, 6-Leads, Body 1,5x1,5mm (max), Pitch 0,50mm, IPC Medium Density"
  oval 0.45x0.2 smd: 1(-0.875,0.5) 2(-0.875,0) 3(-0.875,-0.5) 4(0.875,-0.5) 5(0.875,0) 6(0.875,0.5)
  rect 0.7x0.9 smd: 7(0,0)
  silkscreen extent -1.77,-1 0.8,1, body extent -0.77,-0.77 0.77,0.77, height 0.8
"hdr 1x2" [mil]
  rect 60x120 / inner round 60 / far side rect 60x120 hole 40 paste+0 mask+0: 1(0,0)
  oval 60x120 / inner round 60 / far side oval 60x120 hole 40 paste+0 mask+0: 2(100,0)
  silkscreen extent -50,-50 150,50
"hdr 2x4" [mil]
  rect 60x80 / inner round 60 / far side rect 60x80 hole 40 paste+0 mask+0: 1(-150,50)
  oval 60x80 / inner round 60 / far side oval 60x80 hole 40 paste+0 mask+0: 2(-150,-50) 3(-50,50) 4(-50,-50) 5(50,50) 6(50,-50) 7(150,50) 8(150,-50)
  silkscreen extent -200,-100 200,100
"led HSMH-C190 (Avago Technologies)" [mil]
  rect 40x40 smd paste+0 mask+0: 1(-39,0) 2(39,0)
  silkscreen extent -33,-15 32,15
LTC5549 [mm] "QFN, 12-Leads, Body 2,1x3,1mm (max), Pitch 0,50mm, IPC Medium Density"
  oval 0.6x0.3 smd: 1(-1.55,0.5) 2(-1.55,0) 3(-1.55,-0.5) 7(1.55,-0.5) 8(1.55,0) 9(1.55,0.5)
  oval 0.3x0.6 smd: 4(-0.5,-1.05) 5(0,-1.05) 6(0.5,-1.05) 10(0.5,1.05) 11(0,1.05) 12(-0.5,1.05)
  rect 0.8x0.4 smd: 13(0,0.2)
  silkscreen extent -2.52,-1.05 1.55,1.05, body extent -1.55,-1.05 1.55,1.05, height 0.8
MAXIM-T3255 [mm] "QFN, 32-Leads, Body 5,0x5,0mm (max), Pitch 0,50mm, IPC Medium Density"
  oval 0.65x0.25 smd: 1(-2.525,1.75) 2(-2.525,1.25) 3(-2.525,0.75) 4(-2.525,0.25) 5(-2.525,-0.25) 6(-2.525,-0.75) 7(-2.525,-1.25) 8(-2.525,-1.75) 17(2.525,-1.75) 18(2.525,-1.25) 19(2.525,-0.75) 20(2.525,-0.25) 21(2.525,0.25) 22(2.525,0.75) 23(2.525,1.25) 24(2.525,1.75)
  oval 0.25x0.65 smd: 9(-1.75,-2.525) 10(-1.25,-2.525) 11(-0.75,-2.525) 12(-0.25,-2.525) 13(0.25,-2.525) 14(0.75,-2.525) 15(1.25,-2.525) 16(1.75,-2.525) 25(1.75,2.525) 26(1.25,2.525) 27(0.75,2.525) 28(0.25,2.525) 29(-0.25,2.525) 30(-0.75,2.525) 31(-1.25,2.525) 32(-1.75,2.525)
  rect 3.3x3.3 smd: 33(0,0)
  silkscreen extent -3.53,-2.52 2.52,2.53, body extent -2.5,-2.5 2.5,2.5, height 1
MOUNT_3MM [mm]
  round 3.8 hole 3.4 paste-100 mask-100: 0(0,0)
QFN50P200X300X80-10N [mm] "QFN, 10-Leads, Body 3,0x2,0mm (max), Pitch 0,50mm, IPC Medium Density"
  oval 0.6x0.3 smd: 1(-1.05,1) 2(-1.05,0.5) 3(-1.05,0) 4(-1.05,-0.5) 5(-1.05,-1) 6(1.05,-1) 7(1.05,-0.5) 8(1.05,0) 9(1.05,0.5) 10(1.05,1)
  rect 0.9x2.1 smd: 11(0,0)
  silkscreen extent -2.02,-1.55 1,1.55, body extent -1,-1.5 1,1.5, height 0.8
QFN50P300X300X100-16N [mm] "QFN, 16-Leads, Body 3,1x3,1mm (max), Pitch 0,50mm, IPC Medium Density"
  oval 0.6x0.25 smd: 1(-1.55,0.75) 2(-1.55,0.25) 3(-1.55,-0.25) 4(-1.55,-0.75) 9(1.55,-0.75) 10(1.55,-0.25) 11(1.55,0.25) 12(1.55,0.75)
  oval 0.25x0.6 smd: 5(-0.75,-1.55) 6(-0.25,-1.55) 7(0.25,-1.55) 8(0.75,-1.55) 13(0.75,1.55) 14(0.25,1.55) 15(-0.25,1.55) 16(-0.75,1.55)
  rect 2x2 smd: 17(0,0)
  silkscreen extent -2.53,-1.55 1.55,1.55, body extent -1.55,-1.55 1.55,1.55, height 1
"smd C0402" [mm] "Chip Capacitor; Body 1.0 x 0.5 mm (LxW typ)"
  rect 0.9x0.7 smd: 1(-0.65,0) 2(0.65,0)
  silkscreen extent -1.4,-0.25 -1.4,0.25
"smd C0402_0.35" [mm] "Chip Capacitor; Body 1.0 x 0.5 mm (LxW typ)"
  rect 0.9x0.7 smd: 1(-0.65,0) 2(0.65,0)
  silkscreen extent -1.4,-0.25 -1.4,0.25
"smd C0603" [mm] "Chip Capacitor; Body 1.6 x 0.8 mm (LxW typ)"
  rect 1.1x1 smd: 1(-0.85,0) 2(0.85,0)
  silkscreen extent -1.7,-0.4 -1.7,0.4
"smd C0603_0.45" [mm] "Chip Capacitor; Body 1.6 x 0.8 mm (LxW typ)"
  rect 1.1x1 smd: 1(-0.85,0) 2(0.85,0)
  silkscreen extent -1.7,-0.4 -1.7,0.4
"smd C0603_0.80" [mm] "Chip Capacitor; Body 1.6 x 0.8 mm (LxW typ)"
  rect 1.1x1 smd: 1(-0.85,0) 2(0.85,0)
  silkscreen extent -1.7,-0.4 -1.7,0.4
"smd C0805" [mm] "Chip Capacitor; Body 2.0 x 1.2 mm (LxW typ)"
  rect 1.3x1.5 smd: 1(-0.95,0) 2(0.95,0)
  silkscreen extent -1.9,-0.65 -1.9,0.65
"smd C0805_0.50" [mm] "Chip Capacitor; Body 2.0 x 1.2 mm (LxW typ)"
  rect 1.3x1.5 smd: 1(-0.95,0) 2(0.95,0)
  silkscreen extent -1.9,-0.65 -1.9,0.65
"smd C0805_0.60" [mm] "Chip Capacitor; Body 2.0 x 1.2 mm (LxW typ)"
  rect 1.3x1.5 smd: 1(-0.95,0) 2(0.95,0)
  silkscreen extent -1.9,-0.65 -1.9,0.65
"smd C0805_1.30" [mm] "Chip Capacitor; Body 2.0 x 1.2 mm (LxW typ)"
  rect 1.3x1.5 smd: 1(-0.95,0) 2(0.95,0)
  silkscreen extent -1.9,-0.65 -1.9,0.65
"smd C1206 polar" [mm] "Chip Capacitor; Body 3.2 x 1.6 mm (LxW typ)"
  round 0.5 on Top Overlay: 0(-1.5,-1.5)
  rect 1.6x1.8 smd: 1(-1.4,0) 2(1.4,0)
  silkscreen extent -0.3,-0.8 0.3,0.8
"smd KTL 5x3.2" [mm] "smd Kristal 5x3.2mm"
  oct 2x1.2 smd: 1(0,0)
  rect 2x1.2 smd: 2(3.7,0) 3(3.7,2.2) 4(0,2.2)
  silkscreen extent -0.65,-1.7 4.35,2.7
"smd MSOP/8" [mil]
  rect 15x45 smd: 1(-38.39,-86.61) 2(-12.79,-86.61) 3(12.81,-86.61) 4(38.41,-86.61) 5(38.39,86.61) 6(12.79,86.61) 7(-12.81,86.61) 8(-38.41,86.61)
  silkscreen extent -60,-59 60,61
"smd R EXB38v" [mm] "Panasonic EXB38V resistor network 0603"
  rect 0.65x0.7 smd: 1(-1.2,-0.8) 2(-1.2,0.8) 7(1.2,-0.8) 8(1.2,0.8)
  rect 0.45x0.7 smd: 3(-0.4,-0.8) 4(-0.4,0.8) 5(0.4,-0.8) 6(0.4,0.8)
  silkscreen extent -1.73,-0.4 1.73,0.4
"SMD SC-70 (6-pin)" [mil]
  round 15.75 on Top Overlay: 0(-55.12,-39.37)
  rect 12x40 smd: 1(-25,-50) 2(0,-50) 3(25,-50) 4(25,50) 5(0,50) 6(-25,50)
  silkscreen extent -40,-25 40,25
"smd soicn/8" [mil]
  rrect10% 20x70 smd paste+0 mask+0: 1(-75,-110)
  oval 20x70 smd paste+0 mask+0: 2(-25,-110) 3(25,-110) 4(75,-110) 5(75,110) 6(25,110) 7(-25,110) 8(-75,110)
  silkscreen extent -97,-77 97,77
"smd SOT-23" [mil]
  rect 40x40 smd paste+0 mask+0: 1(-38,-44) 2(38,-44) 3(-1,44)
  silkscreen extent -58,-20 58,26
"smd SOT-457" [mm]
  rect 0.5x0.7 smd: 1(-0.95,-1.325) 2(0,-1.325) 3(0.95,-1.325) 4(0.95,1.325) 5(0,1.325) 6(-0.95,1.325)
  round 0.5 on Top Overlay: 7(-1,-0.25)
  silkscreen extent -1.5,-0.75 1.5,0.75
"smd U.FL" [mm] "Hirose U.FL smt RF connector"
  rect 1.05x2.2 smd: 0(-1.475,0) 0(1.475,0)
  rect 1x1.05 smd: 1(0,1.502)
  silkscreen extent -0.5,-1.3 0.5,0.5, body extent -1.3,-1.3 1.3,1.3, height 1.25
"SO23-5 TI" [mm] "SOT23, 5-Leads, Body 3,0x3,0mm (max), Pitch 0,95mm, IPC Medium Density"
  rect 1.1x0.6 smd: 1(-1.2,0.95) 2(-1.2,0) 3(-1.2,-0.95) 4(1.2,-0.95) 5(1.2,0.95)
  silkscreen extent -1.32,-1.5 0.25,1.92, body extent -0.87,-1.52 0.87,1.53, height 1.1
SOIC127P600X175-8N [mm] "SOIC, 8-Leads, Body 4,9x4,0mm (max), Pitch 1,27mm, IPC Medium Density"
  oval 1.75x0.6 smd: 1(-2.625,1.905) 2(-2.625,0.635) 3(-2.625,-0.635) 4(-2.625,-1.905) 5(2.625,-1.905) 6(2.625,-0.635) 7(2.625,0.635) 8(2.625,1.905)
  silkscreen extent -2.75,-2.45 1.35,2.88, body extent -1.97,-2.47 1.97,2.47, height 1.75
SOT95P230X110-3N [mm] "SOT23, 3-Leads, Body 3,0x2,5mm (max), Pitch 0,95mm, IPC Medium Density"
  rect 1.4x0.6 smd: 1(-0.95,0.95) 2(-0.95,-0.95) 3(0.95,0)
  silkscreen extent -1.07,-1.5 0.7,1.93, body extent -0.7,-1.5 0.7,1.5, height 1.1
SOT223 [mil]
  rect 59x79 smd: 1(-91,-107) 2(0,-107) 3(91,-107)
  rect 150x79 smd: 4(0,141)
  silkscreen extent -141,-161 143,200, body extent -131,-105 135,162, height 51
TSOP65P640X100-16M [mm] "TSOP, 16-Leads, Body 5,1x4,5mm (max), Pitch 0,65mm, IPC Low Density"
  oval 2x0.35 smd: 1(-2.9,2.275) 2(-2.9,1.625) 3(-2.9,0.975) 4(-2.9,0.325) 5(-2.9,-0.325) 6(-2.9,-0.975) 7(-2.9,-1.625) 8(-2.9,-2.275) 9(2.9,-2.275) 10(2.9,-1.625) 11(2.9,-0.975) 12(2.9,-0.325) 13(2.9,0.325) 14(2.9,0.975) 15(2.9,1.625) 16(2.9,2.275)
  silkscreen extent -3.02,-2.55 1.5,3.12, body extent -2.25,-2.55 2.25,2.55, height 1
TSQFP50P900X900X160-48N [mm] "TSQFP, 48-Leads, Body 9,2x9,2mm (max), Pitch 0,50mm, IPC Medium Density"
  oval 1.75x0.3 smd: 1(-4.075,2.75) 2(-4.075,2.25) 3(-4.075,1.75) 4(-4.075,1.25) 5(-4.075,0.75) 6(-4.075,0.25) 7(-4.075,-0.25) 8(-4.075,-0.75) 9(-4.075,-1.25) 10(-4.075,-1.75) 11(-4.075,-2.25) 12(-4.075,-2.75) 25(4.075,-2.75) 26(4.075,-2.25) 27(4.075,-1.75) 28(4.075,-1.25) 29(4.075,-0.75) 30(4.075,-0.25) 31(4.075,0.25) 32(4.075,0.75) 33(4.075,1.25) 34(4.075,1.75) 35(4.075,2.25) 36(4.075,2.75)
  oval 0.3x1.75 smd: 13(-2.75,-4.075) 14(-2.25,-4.075) 15(-1.75,-4.075) 16(-1.25,-4.075) 17(-0.75,-4.075) 18(-0.25,-4.075) 19(0.25,-4.075) 20(0.75,-4.075) 21(1.25,-4.075) 22(1.75,-4.075) 23(2.25,-4.075) 24(2.75,-4.075) 37(2.75,4.075) 38(2.25,4.075) 39(1.75,4.075) 40(1.25,4.075) 41(0.75,4.075) 42(0.25,4.075) 43(-0.25,4.075) 44(-0.75,4.075) 45(-1.25,4.075) 46(-1.75,4.075) 47(-2.25,4.075) 48(-2.75,4.075)
  silkscreen extent -4.2,-2.8 2.8,3.62, body extent -3.5,-3.5 3.5,3.5, height 1.6
USB-B [mil]
  round 55 hole 35: 1(0,0) 2(-98.42,0) 3(-98.42,-78.74) 4(0,-78.74)
  round 150 hole 90.55: 5(-286.22,-185.43) 6(187.8,-185.43)
  silkscreen extent -285,-590 187,79, body extent -343,-590 243,80, height 437
X1G004691000112 [mm]
  rrect50% 0.6x0.75 smd: 1(-0.825,-0.565) 2(0.825,-0.565) 3(0.825,0.565) 4(-0.825,0.565)
  silkscreen extent -1.65,-1.7 1.65,1.7

## Part data
BAT1: library part NX3008NBK
C1 C2 C3 C4 C5 C6 C23 C29 C30 C31 C32 C33 C34 C35 C36 C37 C38 C41 C44 C45 C47 C51 C54 C68 C69 C73 C74 C75 C80 C81 C84: library part CSMD603/100nF, "smd capaciteit, verp.0603, 100nF"
C7 C14 C15: library part CSMD603/1uF, "smd capaciteit, verp.0603, 1uF"
C8 C9 C10 C11 C12 C13 C22 C49 C50: library part CSMD402/100nF, "smd capaciteit, verp.0402, 10nF"
C16 C17 C52 C53 C55 C56 C57 C58 C59 C60 C61 C62 C63 C66 C67: library part CSMD402/22pF, "smd capaciteit, verp.0402, 22pF"
C18 C19 C20: library part CSMD603/12nF, "smd capaciteit, verp.0603, 12nF"
C21 C24 C27: library part CSMD805/1uF, "smd capaciteit, verp.0805, 1uF"
C25 C26 C28: library part CSMD805/330nF, "smd capaciteit, verp.0805, 330nF"
C39 C40 C76 C77 C78 C79 C82 C83: library part CSMD603/10pF, "smd capaciteit, verp.0603, 10pF"
C42 C43: library part CSMD1206/10uF/10V, "smd capaciteit, tantalium, verp.1206, 10uF/10V"
C64 C65 C70 C71 C72 C85 C86: library part CSMD603/100pF, "smd capaciteit, verp.0603, 100pF"
CLK: library part HSMH-C190, "led smd rood, Avago Techn., HSMH-C190"
GPS1: "pcb header recht 2x4  pitch 100mil"
HIGH LOW MID SDR1 SW: "SMA connector, rechtop"
L1 L2 L5: "Ferrite bead, 0805 package"
L6 L7 L8 L9 L10: library part SPL805/250nH, "smd spoel, verpakking 805, 250nH"
LO REF: library part "CON HRS/SMA/ U.FL-R-SMT(01)", "connector Hirose, U.FL serie, U.FL-R-SMT(01)"
LOCK: "led smd groen, Avago Techn., HSMG-C190"
MIX: "led smd geel, Avago Techn., HSMY-C190"
R1: "weerstand SMD603, 5K1"
R2 R12 R18: library part 270R/805, "weerstand SMD805, 270R"
R3: "weerstand SMD805, 270R"
R4 R5 R9: library part 47K/402, "weerstand SMD402, 47K"
R6: library part 22R/Network4/603, "weerstandsnetwerk SMD603, 4x 22R"
R7 R8 R27 R28 R29 R30 R32: library part 750R/603, "weerstand SMD603, 750R"
R10 R11 R39: library part 240K/603, "weerstand SMD603, 240K"
R13 R14 R15 R16 R17: "weerstand SMD603, 100K"
R19 R20 R21 R22: "weerstand SMD603, 470R"
R23: library part 1K5/603, "weerstand SMD603, 1K5"
R24: "weerstand SMD603, 1K5"
R25 R26: "weerstand SMD603, 22R"
R31: library part 1K8/805, "weerstand SMD805, 1K8"
R33 R35: "weerstand SMD603, 10K"
R34 R37 R38: "weerstand SMD603, 51R"
R36: "weerstand SMD603, 390R"
T2: "PNP transistor, smd"
TERM1: "pcb header recht 1x2  pitch 100mil"
U2: library part DAC081C085CIMM/NOPB, "12-Bit Micro Power DAC with I2C interface"
U3: library part MCP602-E/SN, "Dual 2.7V to 6.0V Single Supply CMOS Op Amp"
U5: library part MCP9804, "±0.25°C Typical Accuracy Digital Temperature Sensor"
U6: library part NC7SV157P6X, "TinyLogic  2-Input Non-Inverting Multiplexer"
U7: library part STM32F100xx
U8: "Dual USB 2.0 integrated ESD protection"
USB: "USB B DEVICE CONNECTOR"
USB: "led smd rood, Avago Techn., HSMH-C190"
X1: library part X1G004691000112
X1: "TXC Xtal 16.000 MHz, 5x3.2mm"

## Via types
v1: diameter 0.6, hole 0.25, Top Layer to Bottom Layer, 439 vias
v2: diameter 0.66, hole 0.33, Top Layer to Bottom Layer, tented top, 18 vias
v3: diameter 1.27, hole 0.711, Top Layer to Bottom Layer, 1 vias

## Nets (pads, with @x,y where several pads share a name; then routed paths per layer and width w, separated by ;. In a path a pad name is that pad's centre, name@x,y a point inside that pad or via, vN(x,y) a via of type N, cw(c..) or ccw(c..) an arc to the next point about the centre after c; other vN are vias at no path point)
3V3: C1.2 C2.2 C3.2 C4.2 C5.2 C6.2 C8.2 C9.2 C10.2 C11.2 C12.2 C13.2 C22.2 C23.2 C29.2 C31.2 C32.2 C33.2 C36.2 C37.2 C38.2 C45.2 C47.2 C49.2 C50.2 C51.2 C68.2 C69.1 L2.2 L4.2 R4.2 R5.2 R12.1 R20.2 R21.2 R22.2 R29.2 R31.1 U1.6 U1.10 U1.16 U1.17 U1.26 U1.28 U1.32 U2.6 U3.6 U3.8 U4.3 U4.4 U5.8 U6.5 U7.1 U7.9 U7.24 U7.36 U7.48 U12.9 U14.1 U14.16 | length 104.3
  Top Layer w0.2: C29.2@23.961,17.507 24.011,17.557 U4.3@25.661,17.557 ; U4.3@25.661,17.507 29.911,17.507 R12.1@29.961,17.557 31.093,17.557 v1(31.2,17.45) ; L4.2@26.886,36.242 26.944,36.3 C49.2@28.25,36.3 v1(28.25,36.85) ; U6.5@42.331,16.857 43.711,16.857 44.211,17.357 C33.2@44.211,18.8 ; C33.2@44.15,18.8 C33.2@44.211,18.8 ; C32.2@44.211,20.057 C33.2@44.211,18.8 ; C32.2@44.25,20.2 44.9,20.2 45.25,19.85 45.25,18.8 v1(45.85,18.2) ; v1(45.95,28) 46.236,28.286 C51.2@46.236,28.842 C50.2@46.236,30.092 U12.9@46.236,31.342 ; v1(50,32.35) 50.058,32.292 R4.2@51.036,32.292 51.036,31.492 C3.2@51.436,31.092 C12.2@51.436,29.892 51.986,29.892 52.294,30.2 ; U1.17@53.175,30.2 52.294,30.2 ; U1.16@53.95,30.975 52.669,30.975 52.386,30.692 52.386,30.292 52.294,30.2 ; U1.26@54.45,25.925 54.45,24.828 55.036,24.242 C11.2@55.686,24.242 ; v1(54.486,23.142) 54.586,23.142 C11.2@55.686,24.242 ; U1.28@55.45,25.925 55.45,25.328 55.686,25.092 C11.2@55.686,24.242 ; U1.10@56.95,30.975 56.95,31.35 57.842,32.242 C4.2@58.086,32.242 58.642,32.242 58.9,32.5 58.9,33.042 v1(58.886,33.056) 58.886,35.136 ; U1.32@57.45,25.925 C8.2@57.45,24.35 57.678,24.35 58.186,23.842 ; U1.6@58.225,29.2 59.55,29.2 C9.2@59.8,28.95 60.736,28.014 v1(60.736,27.792) ; v1(58.686,23.764) C1.2@58.7,23.75
  Top Layer w0.25: U2.6@15.886,11.567 17.383,11.567 17.9,11.05 17.9,9.35 C10.2@17.55,9 v1(17.55,7.65) ; U3.8@16.981,20.436 16.981,21.431 17.65,22.1 C22.2@19.521,22.1 ; v1(19.6,24.3) 19.65,24.25 C23.2@19.65,23.3 19.521,23.171 C22.2@19.521,22.1 ; U3.6@19.65,20.229 19.521,20.1 U3.6@19.521,20.436 C22.2@19.521,22.1 ; C22.2@19.65,22.1 C22.2@19.521,22.1 ; R29.2@21.986,36.742 22.708,36.742 v1(22.85,36.6) ; v1(22.35,28.95) 22.7,28.6 C69.1@22.7,27.55 22.9,27.75 R31.1@24.6,27.75 ; R31.1@24.975,27.375 U14.1@27.7,27.375 U14.16@33.5,27.375 ; U5.8@35.236,11.768 36.61,11.768 C31.2@36.736,11.642 38.058,11.642 v1(38.1,11.6) ; C37.2@52.5,7.85 C37.2@52.7,7.85 ; v1(52.65,15.3) 53.1,15.75 C36.2@53.1,16.35 53.675,16.35 U7.24@54.15,15.875 ; U7.36@52.7,8.925 C37.2@52.7,7.85 ; v1(53.45,7.65) 53.25,7.85 C37.2@52.7,7.85 ; R5.2@53.936,35.392 v1@53.936,38.05 ; v1(59.2,13.05) U7.9@60.975,13.05 61.9,13.05 62.2,13.35 62.2,15.089 64.011,16.9 C68.2@64.05,16.9 ; U7.48@59.65,7.725 60.225,7.725 C38.2@61.1,6.85 ; U7.1@60.975,9.05 61.1,8.925 C38.2@61.1,6.85 ; v1(62.2,7.35) 61.7,6.85 C38.2@61.1,6.85 ; R20.2@72.096,6.754 R21.2@72.096,8.354 ; R22.2@72.096,9.954 R21.2@72.096,8.354 ; v1(73.15,8.35) 73.146,8.354 R21.2@72.096,8.354
  Top Layer w0.4: C47.2@13.65,52.2 13.725,52.275 15.475,52.275 L2.2@15.475,51.125
  Top Layer w0.5: C47.2@13.65,52.2 v1(13.65,53.5)
  other v1: 53.9,38.05
5V: C42.1 C54.2 C85.2 GPS1.2 R19.2 T2.2 U8.5 U9.3 U16.5 USB.1@71.5,23.35 | length 178
  Top Layer w0.25: v1(33.15,36.65) 34.258,35.542 C54.2@36.986,35.542 C85.2@38.486,35.542 U16.5@38.486,34.192
  Top Layer w0.3: v1(66.5,20.2) 66.5,20.05 67.3,20.05 ; U8.5@68.275,21.8 67.65,21.8 67.3,21.45 67.3,20.05 ; R19.2@72.096,5.154 73.104,5.154 74.1,6.15 74.1,13.05 72.15,15 68.35,15 67.3,16.05 67.3,20.05
  Top Layer w0.5: v1@72.096,3.954 R19.2@72.096,5.154
  Top Layer w0.6: U9.3@28.518,49.911 28.806,50.2 C42.1@31.3,50.2 31.3,52.05 v1(31.25,52.1) ; T2.2@45.704,62.207 46.296,62.8 v1(47.45,62.8) ; U8.5@68.275,21.8 69.95,21.8 USB.1@71.5,23.35
  Bottom Layer w0.25: v1(31.25,52.1) 33.15,50.2 v1(33.15,36.65)
  Bottom Layer w0.3: v1(66.5,20.2) 66.55,20.2 67.3,20.95 67.3,21.849 67.25,21.899 67.25,23.3 67.55,23.6
  Bottom Layer w0.5: GPS1.2@41.19,6.13 41.19,4.26 43.05,2.4 70.75,2.4 v1@72.075,3.725 ; v1(47.45,62.8) 61.9,62.8 67.55,57.15 67.55,23.6
  Bottom Layer w0.6: v1(31.25,52.1) 31.65,52.5 42,52.5 44.75,55.25 44.75,60.85 46.7,62.8 v1(47.45,62.8)
  other v1: 72.1,3.8
ANT1: R27.2 U14.4 | length 23.6
  Top Layer w0.25: v1(10.45,31.4) 10.95,30.9 R27.2@11.35,30.9 ; v1(18.65,25.3) 18.7,25.3 19.125,24.875 20.675,24.875 20.7,24.85 25.65,24.85 26.225,25.425 U14.4@27.7,25.425
  Bottom Layer w0.25: v1(10.45,31.4) 11.9,31.4 13.3,30 13.3,26.05 14.05,25.3 v1(18.65,25.3)
ANT2: R8.1 U14.5 | length 26.2
  Top Layer w0.25: v1(10.15,34.7) 10.25,34.8 R8.1@11.35,34.8 ; v1(20.5,24.25) 20.5,24.45 25.816,24.45 26.141,24.775 U14.5@27.7,24.775
  Bottom Layer w0.25: v1(10.15,34.7) 10.15,33.9 13.9,30.15 13.9,26.3 14.35,25.85 18.387,25.85 18.412,25.875 18.888,25.875 20.5,24.263 v1(20.5,24.25)
BSEL: R7.1 U14.12 | length 7
  Top Layer w0.2: U14.12@33.5,24.775 36.875,24.775 37.5,25.4 37.5,26.35 36.886,26.964 R7.1@36.886,27.892
CLK_LED: CLK.2 U7.38 | length 17.9
  Top Layer w0.32: U7.38@54.65,7.725 54.65,4.05 56.45,2.25 63.2,2.25 64.85,3.9 64.85,4.5 65.504,5.154 CLK.2@66.555,5.154
CPU_RX: GPS1.8 U7.22 | length 13.1
  Top Layer w0.25: v1(54.9,11.5) 55.15,11.75 U7.22@55.15,15.875
  Bottom Layer w0.25: GPS1.8@48.81,6.13 49.98,6.13 54.9,11.05 v1(54.9,11.5)
CPU_TX: GPS1.6 U7.21 | length 17.8
  Top Layer w0.25: U7.21@55.65,15.875 55.65,11.25 v1(55.75,11.15)
  Bottom Layer w0.25: GPS1.6@46.27,6.13 46.27,5.83 47.261,4.839 49.75,4.839 55.75,10.839 v1(55.75,11.15)
CS_PLL: R6.5 U7.14 | length 7.8
  Top Layer w0.2: U7.14@59.15,15.875 59.15,17.55 62.3,20.7 R6.5@62.3,22.4